# EAGLE board PCB (EAGLE 9.7.0)
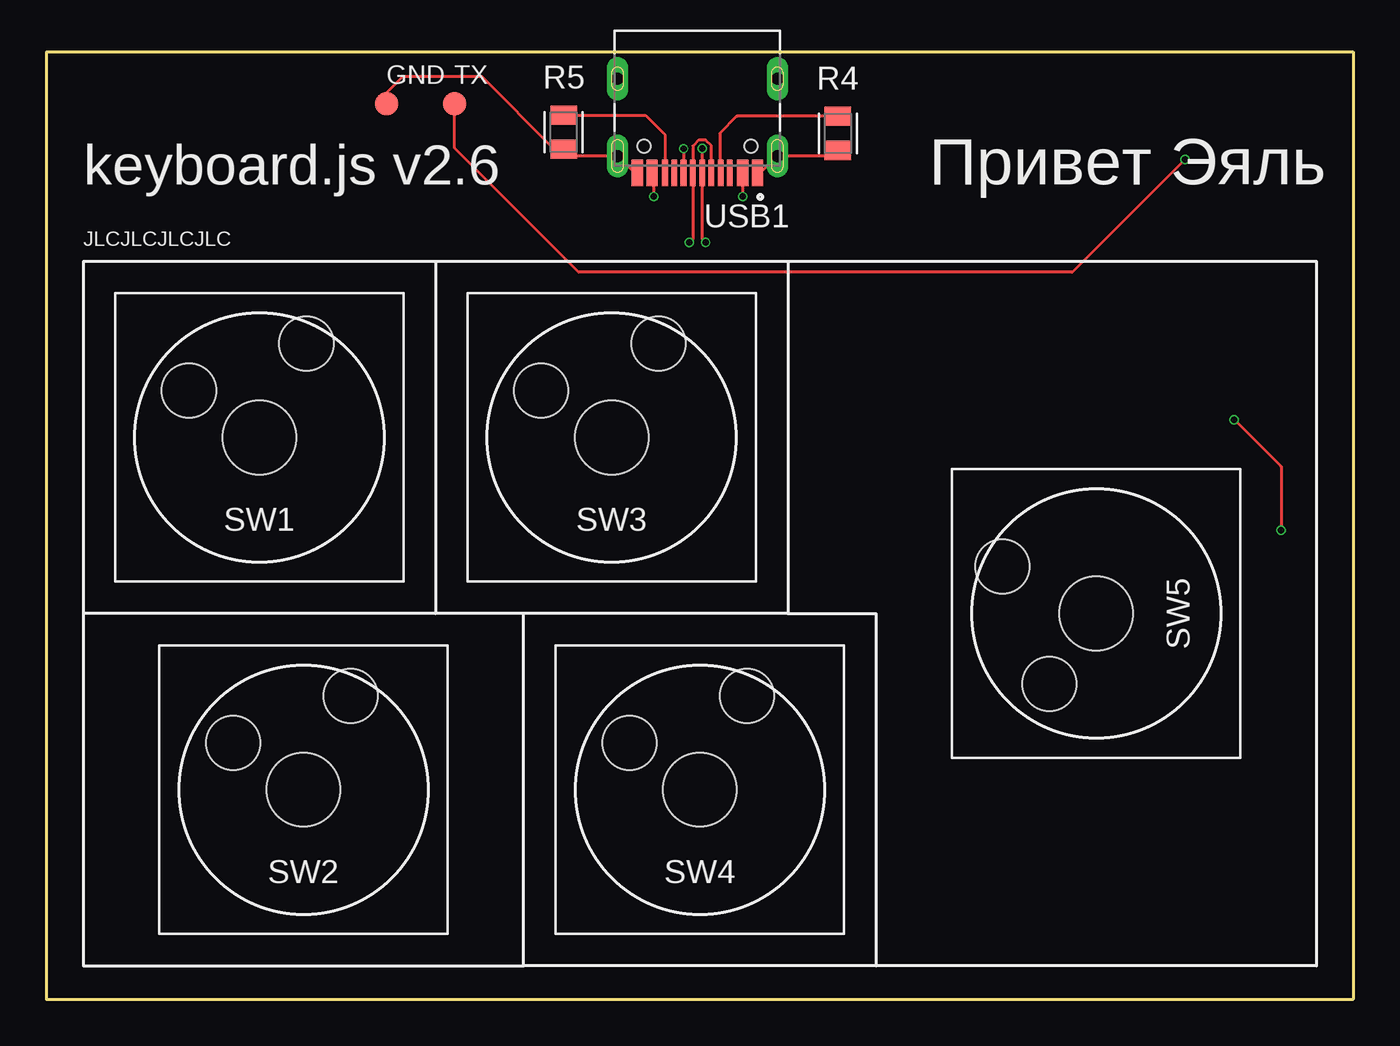
[diagram p0: board, top side]
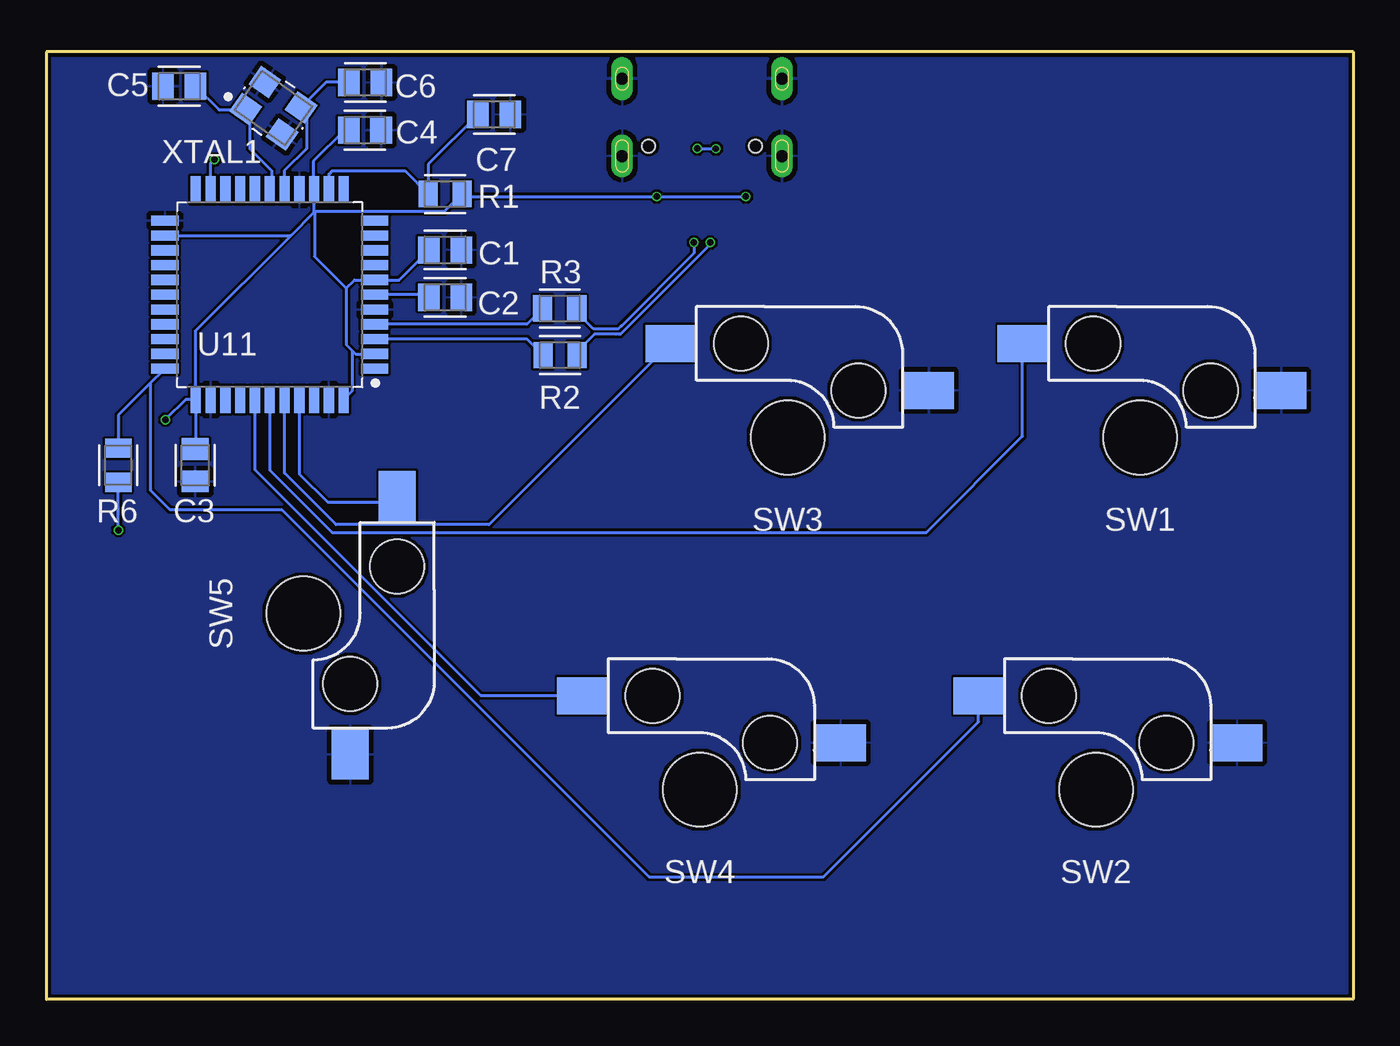
[diagram p1: board, bottom side, seen from below]

Size 70.67 x 51.23 mm. Coordinates in mm from the lower left corner, seen from the top.
Outline: 0,51.23 70.67,51.23 70.67,0 0,0 0,51.23
Copper layers (1*16): Top / Bottom
Stack-up Default Layer Stack: Top User Defined 0.035mm / Dielectric-1 User Defined 1.6mm / Bottom User Defined 0.035mm
Design rules: minimum drill size 0.3mm, minimum copper width 5mil, keepout clearance 0mil, drill distance 6mil, dimension clearance 0.2mm, restrict clearance 0mil, copper clearance wire_polygon to wire_polygon 5mil, copper clearance wire_polygon to pad_smd 5mil, copper clearance wire_polygon to via 5mil, copper clearance pad_smd to pad_smd 5mil, copper clearance pad_smd to via 5mil, copper clearance via to via 5mil, copper clearance smd to pad (same net) 5mil, copper clearance smd to via (same net) 5mil, copper clearance smd to smd (same net) 5mil

## Footprints (pad centres in the part's own frame; a part is rotated, then mirrored left to right if it is on the bottom)
CAPC2012X110 = smd 1.165 x 1.465: 1 -0.875,0; 2 0.875,0
RESC2012X65 = smd 1.031 x 1.42: 1 -0.919,0; 2 0.919,0
SWITCH_SOCKET = smd 2.7 x 2 bottom: 1 6.355,5.08; 2 -7.625,2.54 | hole 4: 0,0 | hole 2.93: -3.81,2.54; 2.54,5.08
TP = smd 1.27 x 1.27: P$1 0,0
ATMEGA32U4-TQFP44 = smd 1.472 x 0.55: 1 -5.672,4; 2 -5.672,3.2; 3 -5.672,2.4; 4 -5.672,1.6; 5 -5.672,0.8; 6 -5.672,0; 7 -5.672,-0.8; 8 -5.672,-1.6; 9 -5.672,-2.4; 10 -5.672,-3.2; 11 -5.672,-4; 23 5.672,-4; 24 5.672,-3.2; 25 5.672,-2.4; 26 5.672,-1.6; 27 5.672,-0.8; 28 5.672,0; 29 5.672,0.8; 30 5.672,1.6; 31 5.672,2.4; 32 5.672,3.2; 33 5.672,4 | smd 0.55 x 1.472: 12 -4,-5.672; 13 -3.2,-5.672; 14 -2.4,-5.672; 15 -1.6,-5.672; 16 -0.8,-5.672; 17 0,-5.672; 18 0.8,-5.672; 19 1.6,-5.672; 20 2.4,-5.672; 21 3.2,-5.672; 22 4,-5.672; 34 4,5.672; 35 3.2,5.672; 36 2.4,5.672; 37 1.6,5.672; 38 0.8,5.672; 39 0,5.672; 40 -0.8,5.672; 41 -1.6,5.672; 42 -2.4,5.672; 43 -3.2,5.672; 44 -4,5.672
TYPE-C-31-M-12 = smd 0.6 x 1.45: A1B12 3.25,-3.825; A4B9 2.45,-3.825; B1A12 -3.25,-3.825; B4A9 -2.45,-3.825 | smd 0.3 x 1.45: A5 1.25,-3.825; A6 0.25,-3.825; A7 -0.25,-3.825; A8 -1.25,-3.825; B5 -1.75,-3.825; B6 -0.75,-3.825; B7 0.75,-3.825; B8 1.75,-3.825 | drill 0.65 pad 1.05 long: S1 -4.32,1.27; S2 4.32,1.27; S3 -4.32,-2.91; S4 4.32,-2.91 | hole 0.7: 2.89,-2.38; -2.89,-2.38
OSCCC320X250X69N = smd 1.317 x 1.217: 1 -1.2,-0.9; 2 1.2,-0.9; 3 1.2,0.9; 4 -1.2,0.9

## Placement (x,y rotation side)
C1  10uF  [CAPC2012X110]  49.1,40.52 180 bottom
C2  1uF  [CAPC2012X110]  49.1,37.96 180 bottom
C3  100nF  [CAPC2012X110]  62.61,28.88 90 bottom
C4  100nF  [CAPC2012X110]  53.44,47 180 bottom
C5  10pF  [CAPC2012X110]  63.48,49.38 180 bottom
C6  10pF  [CAPC2012X110]  53.42,49.58 0 bottom
C7  100nF  [CAPC2012X110]  46.45,47.85 180 bottom
R1  10K  [RESC2012X65]  49.1,43.55 180 bottom
R2  22  [RESC2012X65]  42.89,34.83 180 bottom
R3  22  [RESC2012X65]  42.9,37.36 180 bottom
R4  5K1  [RESC2012X65]  42.8,46.83 90 top
R5  5K1  [RESC2012X65]  27.98,46.89 90 top
R6  10K  [RESC2012X65]  66.77,28.88 90 bottom
SW1  {  [SWITCH_SOCKET]  11.53,30.39 0 top
SW2  ¯\_(ツ)_/¯  [SWITCH_SOCKET]  13.91,11.34 0 top
SW3  }  [SWITCH_SOCKET]  30.57,30.39 0 top
SW4  ;  [SWITCH_SOCKET]  35.34,11.34 0 top
SW5  ENTER  [SWITCH_SOCKET]  56.77,20.86 90 top
TP1  TX  [TP]  22.08,48.44 0 top
TP2  GND  [TP]  18.4,48.44 0 top
U11  ATMEGA32U4  [ATMEGA32U4-TQFP44]  58.58,38.1 180 bottom
USB1  TYPE-C-31-M-12  [TYPE-C-31-M-12]  35.21,48.51 0 top
XTAL1  10pF  [OSCCC320X250X69N]  58.38,48.19 325 bottom

## Library data of the parts
C1-C7 = Capacitor; CATEGORY: Capacitor
R1-R6 = Resistor; CATEGORY: Resistor; SUB-CATEGORY: Fixed
SW1-SW5 = keyboard
TP1 TP2 U11 USB1 XTAL1 = _GMLib

## Nets
D_N: R2.1 USB1.A7 USB1.B7
D_P: R3.1 USB1.A6 USB1.B6
GND: C1.1 C2.1 C3.1 C4.1 C5.2 C6.2 C7.1 R4.1 R5.1 SW1.2 SW2.2 SW3.2 SW4.2 SW5.2 TP2.P$1 U11.5 U11.15 U11.23 U11.35 U11.43 USB1.A1B12 USB1.B1A12 USB1.S1 USB1.S2 USB1.S3 USB1.S4 XTAL1.2 XTAL1.4
N$1: C7.2 R1.2 U11.13
N$3: C2.2 U11.6
N$4: R2.2 U11.3
N$5: R3.2 U11.4
N$6: R4.2 USB1.A5
N$7: R5.2 USB1.B5
N$8: TP1.P$1 U11.21
SW1: SW1.1 U11.39
SW2: R6.2 SW2.1 U11.33
SW3: SW3.1 U11.40
SW4: SW4.1 U11.38
SW5: SW5.1 U11.41
VCC: C1.2 C3.2 C4.2 R1.1 R6.1 U11.2 U11.7 U11.14 U11.24 U11.34 U11.44 USB1.A4B9 USB1.B4A9
XTAL1: C5.1 U11.17 XTAL1.1
XTAL2: C6.1 U11.16 XTAL1.3

## Tracks (layer width: path | path; a pad name or v marks a point on that pad's centre or on a via)
D_N  (via drill 0.35)
  Top 0.152: USB1.B7 35.96,45.86 35.96,46.15 35.65,46.46 35.28,46.46 34.96,46.14 USB1.A7 34.96,41.12 v34.77,40.92
  Bottom 0.152: R2.1 41.97,35.03 41.03,35.97 39.88,35.97 39.72,35.97 39.63,35.97 34.77,40.83 v34.77,40.92
D_P  (via drill 0.35)
  Top 0.152: v35.46,46 USB1.A6 35.46,41.12 v35.65,40.92 | v34.46,46 USB1.B6
  Bottom 0.152: v35.46,46 v34.47,46 v34.46,46 | R3.1 41.98,37.17 41.07,36.25 39.74,36.25 39.62,36.37 39.57,36.42 35.65,40.34 v35.65,40.92
GND
  Top 0.152: R4.1 42.49,45.6 USB1.S4 38.61,44.69 USB1.A1B12 | USB1.B1A12 31.8,44.69 USB1.S3 28.34,45.6 R5.1 27.47,45.97 23.55,49.88 19.27,49.88 18.4,49.01 TP2.P$1
  pour Bottom: 116,82 -13,82 -13,-36 115,-36 116,-37
N$1
  Bottom 0.152: U11.13 55.38,44.63 55.21,44.8 51.28,44.8 R1.2 50.02,45.15 C7.2
N$3
  Bottom 0.152: C2.2 50.12,38.1 U11.6
N$4
  Bottom 0.152: U11.3 46.12,35.7 44.68,35.7 R2.2
N$5
  Bottom 0.152: U11.4 44.68,36.5 R3.2
N$6
  Top 0.152: R4.2 37.33,47.75 36.42,46.83 36.42,44.73 USB1.A5
N$7
  Top 0.152: R5.2 32.4,47.81 33.46,46.75 USB1.B5
N$8  (via drill 0.35)
  Top 0.152: v61.57,45.42 55.47,39.32 28.79,39.32 22.08,46.03 TP1.P$1
  Bottom 0.152: U11.21 61.78,45.2 v61.57,45.42
SW1
  Bottom 0.152: U11.39 58.58,28.61 55.21,25.24 23.08,25.24 17.88,30.45 SW1.1
SW2
  Bottom 0.152: U11.33 64.35,34.01 65.04,33.32 | 65.04,33.32 65.04,27.53 63.98,26.48 57.93,26.48 38.07,6.62 28.65,6.62 20.26,15 SW2.1 | R6.2 66.77,31.59 65.04,33.32
SW3
  Bottom 0.152: SW3.1 46.73,25.66 55,25.66 57.78,28.45 U11.40
SW4
  Bottom 0.152: U11.38 59.38,28.63 47.17,16.42 SW4.1
SW5
  Bottom 0.152: U11.41 56.98,28.41 55.47,26.9 52.01,26.9 SW5.1
VCC  (via drill 0.35)
  Top 0.152: USB1.B4A9 32.84,44.61 v32.84,43.41 | USB1.A4B9 v37.66,43.41 | v64.23,31.34 66.77,28.8 v66.77,25.37
  Bottom 0.152: v32.84,43.41 v37.66,43.41 48.05,43.41 R1.1 49.15,42.58 56.18,42.58 | C4.2 54.54,47 56.23,45.31 56.23,43.82 U11.14 56.18,42.58 | U11.34 62.58,29.78 C3.2 | U11.34 62.58,36.16 57.44,41.3 | 57.44,41.3 56.18,42.56 | 56.18,42.56 56.17,42.58 56.17,40.17 54.45,38.45 | 56.18,42.56 56.18,42.58 | 54.45,38.45 54,38.9 U11.7 51.59,38.9 C1.2 | 54.45,38.45 54.45,35.4 54.13,35.09 | 54.13,35.09 53.94,34.9 U11.2 | U11.24 57.44,41.3 | 54.13,35.09 54.13,32.88 U11.44 | U11.34 63.14,32.43 v64.23,31.34 | v66.77,25.37 R6.1
XTAL1
  Bottom 0.152: U11.17 58.48,43.88 58.48,44.81 59.67,46 59.67,47.85 59.85,48.11 | 59.85,48.11 XTAL1.1 | C5.1 61.33,48.11 59.85,48.11
XTAL2
  Bottom 0.152: U11.16 57.8,43.79 57.8,44.8 56.6,46 56.6,47.96 XTAL1.3 55.54,49.58 C6.1

## Text on the board
SilkscreenTop: keyboard.js v2.6 | Привет Эяль | JLCJLCJLCJLC